# EAGLE board LilyPixel-Panel-v11 (EAGLE 6.6.0), part 1 of 2
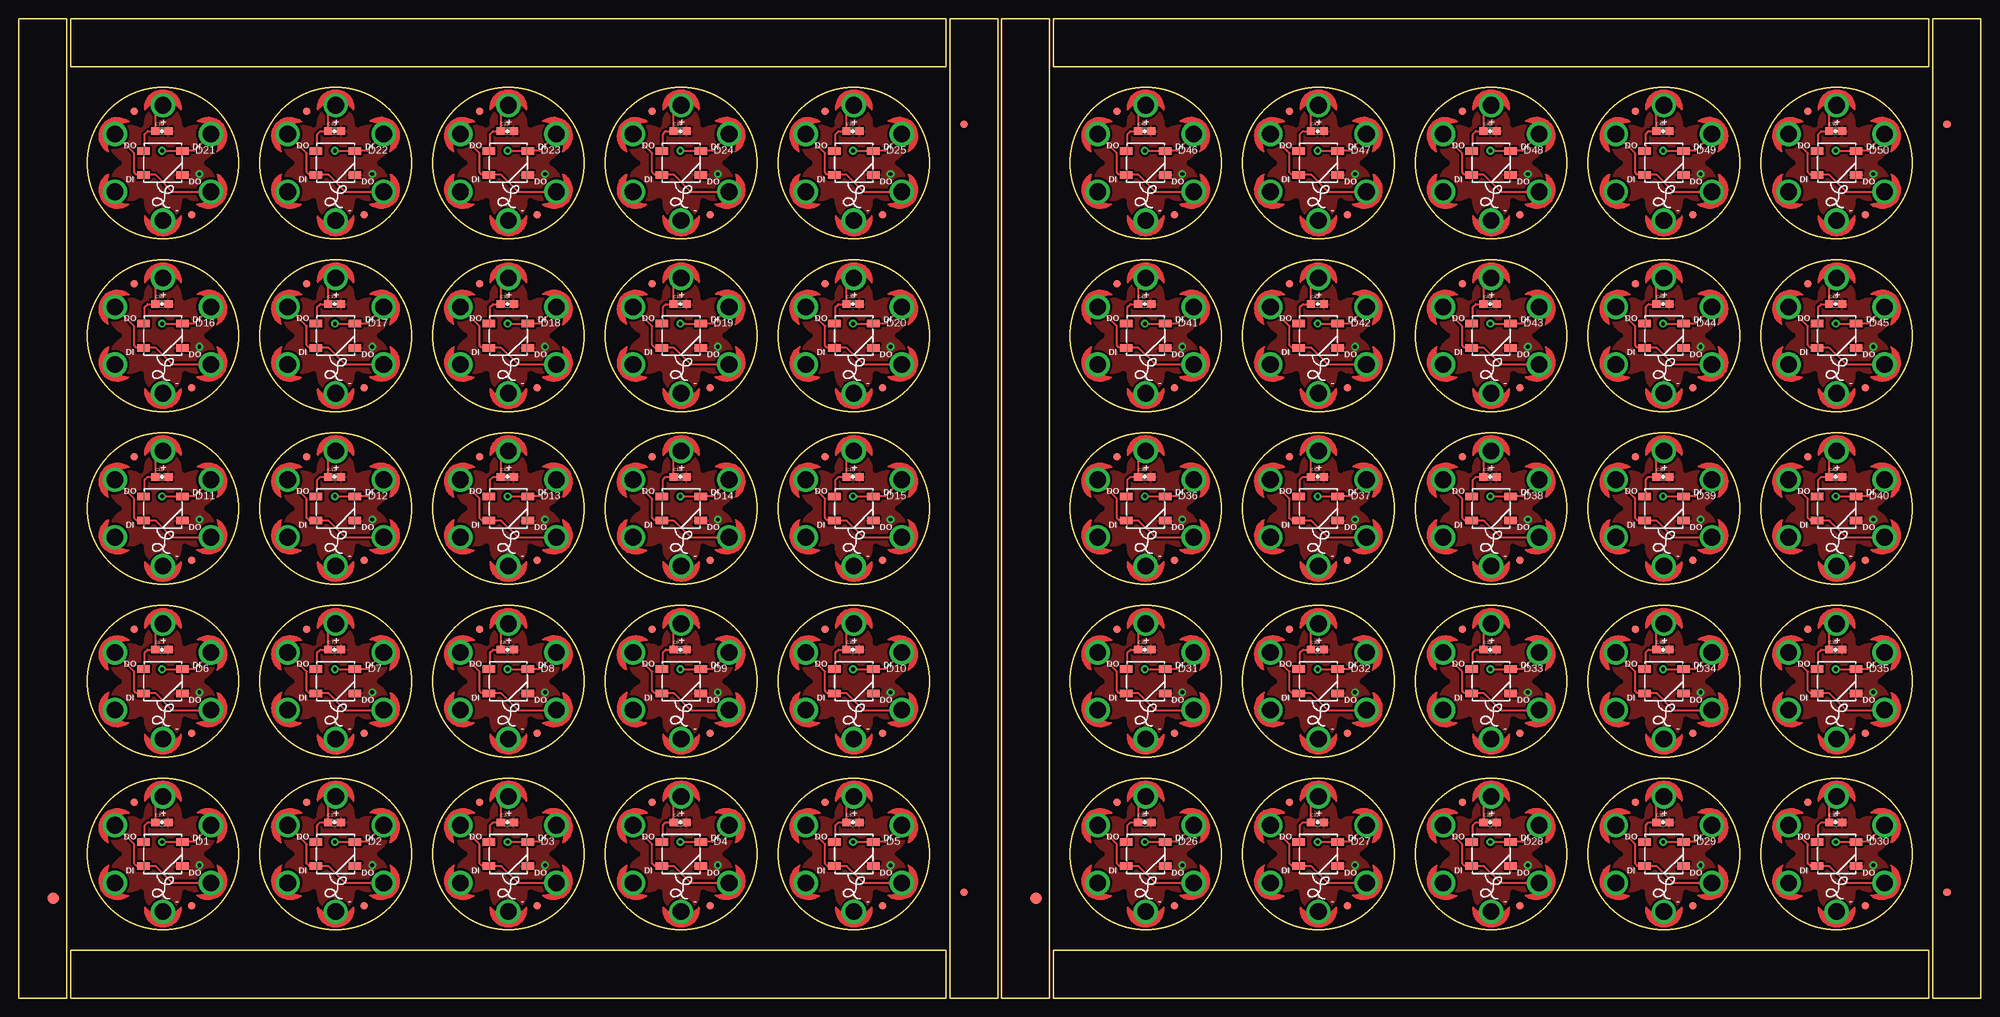
[diagram p0: board, top side]
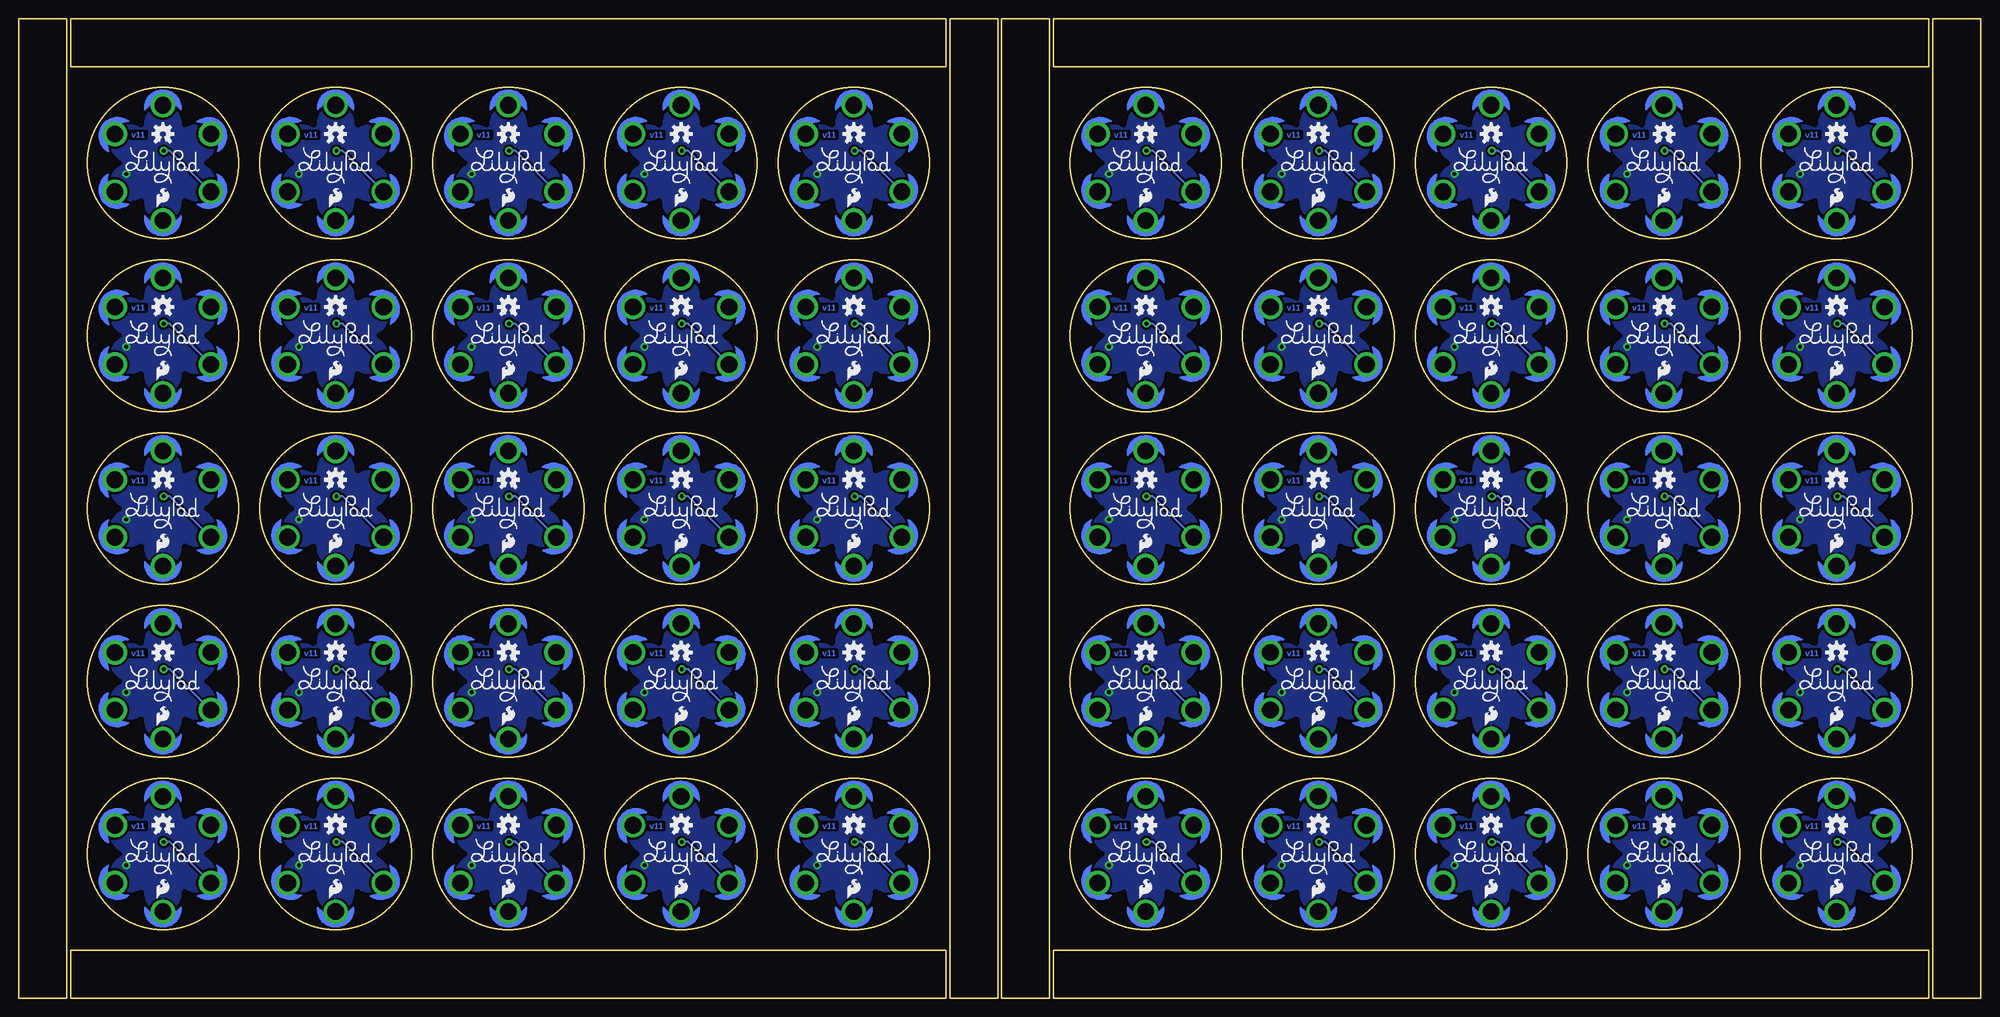
[diagram p1: board, bottom side, seen from below]

Size 259.59 x 129.54 mm. Coordinates in mm from the lower left corner, seen from the top.
Outline: 6.35,0 6.35,129.54 0,129.54 0,0 6.35,0
Outline: 6.86,0 122.68,0 122.68,6.35 6.86,6.35 6.86,0
Outline: 129.54,0 129.54,129.54 123.19,129.54 123.19,0 129.54,0
Outline: 122.68,129.54 6.86,129.54 6.86,123.19 122.68,123.19 122.68,129.54
Outline: 136.4,0 136.4,129.54 130.05,129.54 130.05,0 136.4,0
Outline: 136.91,0 252.73,0 252.73,6.35 136.91,6.35 136.91,0
Outline: 259.59,0 259.59,129.54 253.24,129.54 253.24,0 259.59,0
Outline: 252.73,129.54 136.91,129.54 136.91,123.19 252.73,123.19 252.73,129.54
Outline: circle at 19.05,19.05 radius 10
Outline: circle at 41.91,19.05 radius 10
Outline: circle at 64.77,19.05 radius 10
Outline: circle at 87.63,19.05 radius 10
Outline: circle at 110.49,19.05 radius 10
Outline: circle at 19.05,41.91 radius 10
Outline: circle at 41.91,41.91 radius 10
Outline: circle at 64.77,41.91 radius 10
Outline: circle at 87.63,41.91 radius 10
Outline: circle at 110.49,41.91 radius 10
Outline: circle at 19.05,64.77 radius 10
Outline: circle at 41.91,64.77 radius 10
Outline: circle at 64.77,64.77 radius 10
Outline: circle at 87.63,64.77 radius 10
Outline: circle at 110.49,64.77 radius 10
Outline: circle at 19.05,87.63 radius 10
Outline: circle at 41.91,87.63 radius 10
Outline: circle at 64.77,87.63 radius 10
Outline: circle at 87.63,87.63 radius 10
Outline: circle at 110.49,87.63 radius 10
Copper layers (1*16): Top 0.035mm / dielectric 1.5mm / Bottom 0.035mm
Design rules "SparkFun-2-layer": minimum track width 7mil, minimum drill 15mil, track to track 8mil, track to pad 8mil, pad to pad 8mil, via to via 8mil, smd to smd 8mil, copper to edge 8mil, drill to drill 8mil, minimum pad ring 12mil, minimum via ring 10mil, stop-mask expansion 4mil, vias tented up to drill 20mil, thermal gap 10mil
tRestrict: area 8.9,19.1 to 19.1,29; area 19.1,19.1 to 29.2,29; area 19.1,8.9 to 29.2,19.1; area 8.9,8.9 to 19.1,19.1; area 31.8,19.1 to 41.9,29; area 41.9,19.1 to 52,29; area 41.9,8.9 to 52,19.1; area 31.8,8.9 to 41.9,19.1; area 54.7,19.1 to 64.8,29; area 64.8,19.1 to 74.9,29; area 64.8,8.9 to 74.9,19.1; area 54.7,8.9 to 64.8,19.1; 188 more areas; 300 lines
bRestrict: area 8.9,19.1 to 19.1,29; area 19.1,19.1 to 29.2,29; area 19.1,8.9 to 29.2,19.1; area 8.9,8.9 to 19.1,19.1; area 31.8,19.1 to 41.9,29; area 41.9,19.1 to 52,29; area 41.9,8.9 to 52,19.1; area 31.8,8.9 to 41.9,19.1; area 54.7,19.1 to 64.8,29; area 64.8,19.1 to 74.9,29; area 64.8,8.9 to 74.9,19.1; area 54.7,8.9 to 64.8,19.1; 188 more areas; 300 lines

## Footprints (pad centres in the part's own frame; a part is rotated, then mirrored left to right if it is on the bottom)
0603-CAP = smd 1.1 x 1: 1 -0.85,0; 2 0.85,0
WS2812B = smd 1.651 x 1: 1 -2.577,1.6; 2 -2.577,-1.6; 3 2.577,-1.6; 4 2.577,1.6
FIDUCIAL-1.5X3 = smd 1.5 x 1.5: 1 0,0
FIDUCIAL-1X2 = smd 1 x 1: 1 0,0
PETAL-SMALL-2SIDE = drill 2.2: 1 0,0

## Placement (x,y rotation side)
C1  0.1uF  [0603-CAP]  41.78,23.24 0 top
C2  0.1uF  [0603-CAP]  18.92,23.24 0 top
C3  0.1uF  [0603-CAP]  64.64,23.24 0 top
C4  0.1uF  [0603-CAP]  87.5,23.24 0 top
C5  0.1uF  [0603-CAP]  110.36,23.24 0 top
C6  0.1uF  [0603-CAP]  18.92,46.1 0 top
C7  0.1uF  [0603-CAP]  41.78,46.1 0 top
C8  0.1uF  [0603-CAP]  64.64,46.1 0 top
C9  0.1uF  [0603-CAP]  87.5,46.1 0 top
C10  0.1uF  [0603-CAP]  110.36,46.1 0 top
C11  0.1uF  [0603-CAP]  18.92,68.96 0 top
C12  0.1uF  [0603-CAP]  41.78,68.96 0 top
C13  0.1uF  [0603-CAP]  64.64,68.96 0 top
C14  0.1uF  [0603-CAP]  87.5,68.96 0 top
C15  0.1uF  [0603-CAP]  110.36,68.96 0 top
C16  0.1uF  [0603-CAP]  18.92,91.82 0 top
C17  0.1uF  [0603-CAP]  41.78,91.82 0 top
C18  0.1uF  [0603-CAP]  64.64,91.82 0 top
C19  0.1uF  [0603-CAP]  87.5,91.82 0 top
C20  0.1uF  [0603-CAP]  110.36,91.82 0 top
C21  0.1uF  [0603-CAP]  18.92,114.68 0 top
C22  0.1uF  [0603-CAP]  41.78,114.68 0 top
C23  0.1uF  [0603-CAP]  64.64,114.68 0 top
C24  0.1uF  [0603-CAP]  87.5,114.68 0 top
C25  0.1uF  [0603-CAP]  110.36,114.68 0 top
C26  0.1uF  [0603-CAP]  148.97,23.24 0 top
C27  0.1uF  [0603-CAP]  171.83,23.24 0 top
C28  0.1uF  [0603-CAP]  194.69,23.24 0 top
C29  0.1uF  [0603-CAP]  217.55,23.24 0 top
C30  0.1uF  [0603-CAP]  240.41,23.24 0 top
C31  0.1uF  [0603-CAP]  148.97,46.1 0 top
C32  0.1uF  [0603-CAP]  171.83,46.1 0 top
C33  0.1uF  [0603-CAP]  194.69,46.1 0 top
C34  0.1uF  [0603-CAP]  217.55,46.1 0 top
C35  0.1uF  [0603-CAP]  240.41,46.1 0 top
C36  0.1uF  [0603-CAP]  148.97,68.96 0 top
C37  0.1uF  [0603-CAP]  171.83,68.96 0 top
C38  0.1uF  [0603-CAP]  194.69,68.96 0 top
C39  0.1uF  [0603-CAP]  217.55,68.96 0 top
C40  0.1uF  [0603-CAP]  240.41,68.96 0 top
C41  0.1uF  [0603-CAP]  148.97,91.82 0 top
C42  0.1uF  [0603-CAP]  171.83,91.82 0 top
C43  0.1uF  [0603-CAP]  194.69,91.82 0 top
C44  0.1uF  [0603-CAP]  217.55,91.82 0 top
C45  0.1uF  [0603-CAP]  240.41,91.82 0 top
C46  0.1uF  [0603-CAP]  148.97,114.68 0 top
C47  0.1uF  [0603-CAP]  171.83,114.68 0 top
C48  0.1uF  [0603-CAP]  194.69,114.68 0 top
C49  0.1uF  [0603-CAP]  217.55,114.68 0 top
C50  0.1uF  [0603-CAP]  240.41,114.68 0 top
D1  WS2812B  [WS2812B]  19.05,19.05 0 top
D2  WS2812B  [WS2812B]  41.91,19.05 0 top
D3  WS2812B  [WS2812B]  64.77,19.05 0 top
D4  WS2812B  [WS2812B]  87.63,19.05 0 top
D5  WS2812B  [WS2812B]  110.49,19.05 0 top
D6  WS2812B  [WS2812B]  19.05,41.91 0 top
D7  WS2812B  [WS2812B]  41.91,41.91 0 top
D8  WS2812B  [WS2812B]  64.77,41.91 0 top
D9  WS2812B  [WS2812B]  87.63,41.91 0 top
D10  WS2812B  [WS2812B]  110.49,41.91 0 top
D11  WS2812B  [WS2812B]  19.05,64.77 0 top
D12  WS2812B  [WS2812B]  41.91,64.77 0 top
D13  WS2812B  [WS2812B]  64.77,64.77 0 top
D14  WS2812B  [WS2812B]  87.63,64.77 0 top
D15  WS2812B  [WS2812B]  110.49,64.77 0 top
D16  WS2812B  [WS2812B]  19.05,87.63 0 top
D17  WS2812B  [WS2812B]  41.91,87.63 0 top
D18  WS2812B  [WS2812B]  64.77,87.63 0 top
D19  WS2812B  [WS2812B]  87.63,87.63 0 top
D20  WS2812B  [WS2812B]  110.49,87.63 0 top
D21  WS2812B  [WS2812B]  19.05,110.49 0 top
D22  WS2812B  [WS2812B]  41.91,110.49 0 top
D23  WS2812B  [WS2812B]  64.77,110.49 0 top
D24  WS2812B  [WS2812B]  87.63,110.49 0 top
D25  WS2812B  [WS2812B]  110.49,110.49 0 top
D26  WS2812B  [WS2812B]  149.1,19.05 0 top
D27  WS2812B  [WS2812B]  171.96,19.05 0 top
D28  WS2812B  [WS2812B]  194.82,19.05 0 top
D29  WS2812B  [WS2812B]  217.68,19.05 0 top
D30  WS2812B  [WS2812B]  240.54,19.05 0 top
D31  WS2812B  [WS2812B]  149.1,41.91 0 top
D32  WS2812B  [WS2812B]  171.96,41.91 0 top
D33  WS2812B  [WS2812B]  194.82,41.91 0 top
D34  WS2812B  [WS2812B]  217.68,41.91 0 top
D35  WS2812B  [WS2812B]  240.54,41.91 0 top
D36  WS2812B  [WS2812B]  149.1,64.77 0 top
D37  WS2812B  [WS2812B]  171.96,64.77 0 top
D38  WS2812B  [WS2812B]  194.82,64.77 0 top
D39  WS2812B  [WS2812B]  217.68,64.77 0 top
D40  WS2812B  [WS2812B]  240.54,64.77 0 top
D41  WS2812B  [WS2812B]  149.1,87.63 0 top
D42  WS2812B  [WS2812B]  171.96,87.63 0 top
D43  WS2812B  [WS2812B]  194.82,87.63 0 top
D44  WS2812B  [WS2812B]  217.68,87.63 0 top
D45  WS2812B  [WS2812B]  240.54,87.63 0 top
D46  WS2812B  [WS2812B]  149.1,110.49 0 top
D47  WS2812B  [WS2812B]  171.96,110.49 0 top
D48  WS2812B  [WS2812B]  194.82,110.49 0 top
D49  WS2812B  [WS2812B]  217.68,110.49 0 top
D50  WS2812B  [WS2812B]  240.54,110.49 0 top
E$1  [FIDUCIAL-1.5X3]  4.57,13.21 0 top
E$2  [FIDUCIAL-1X2]  255.14,13.97 0 top
E$3  [FIDUCIAL-1X2]  255.14,115.57 180 top
E$4  [FIDUCIAL-1X2]  125.09,13.97 0 top
E$5  [FIDUCIAL-1X2]  125.09,115.57 180 top
E$6  [FIDUCIAL-1.5X3]  134.62,13.21 0 top
FID1  FIDUCIAL1X2  [FIDUCIAL-1X2]  15.24,25.91 0 top
FID2  FIDUCIAL1X2  [FIDUCIAL-1X2]  22.86,12.19 0 top
FID3  FIDUCIAL1X2  [FIDUCIAL-1X2]  38.1,25.91 0 top
FID4  FIDUCIAL1X2  [FIDUCIAL-1X2]  45.72,12.19 0 top
FID5  FIDUCIAL1X2  [FIDUCIAL-1X2]  60.96,25.91 0 top
FID6  FIDUCIAL1X2  [FIDUCIAL-1X2]  68.58,12.19 0 top
FID7  FIDUCIAL1X2  [FIDUCIAL-1X2]  83.82,25.91 0 top
FID8  FIDUCIAL1X2  [FIDUCIAL-1X2]  91.44,12.19 0 top
FID9  FIDUCIAL1X2  [FIDUCIAL-1X2]  106.68,25.91 0 top
FID10  FIDUCIAL1X2  [FIDUCIAL-1X2]  114.3,12.19 0 top
FID11  FIDUCIAL1X2  [FIDUCIAL-1X2]  15.24,48.77 0 top
FID12  FIDUCIAL1X2  [FIDUCIAL-1X2]  22.86,35.05 0 top
FID13  FIDUCIAL1X2  [FIDUCIAL-1X2]  38.1,48.77 0 top
FID14  FIDUCIAL1X2  [FIDUCIAL-1X2]  45.72,35.05 0 top
FID15  FIDUCIAL1X2  [FIDUCIAL-1X2]  60.96,48.77 0 top
FID16  FIDUCIAL1X2  [FIDUCIAL-1X2]  68.58,35.05 0 top
FID17  FIDUCIAL1X2  [FIDUCIAL-1X2]  83.82,48.77 0 top
FID18  FIDUCIAL1X2  [FIDUCIAL-1X2]  91.44,35.05 0 top
FID19  FIDUCIAL1X2  [FIDUCIAL-1X2]  106.68,48.77 0 top
FID20  FIDUCIAL1X2  [FIDUCIAL-1X2]  114.3,35.05 0 top
FID21  FIDUCIAL1X2  [FIDUCIAL-1X2]  15.24,71.63 0 top
FID22  FIDUCIAL1X2  [FIDUCIAL-1X2]  22.86,57.91 0 top
FID23  FIDUCIAL1X2  [FIDUCIAL-1X2]  38.1,71.63 0 top
FID24  FIDUCIAL1X2  [FIDUCIAL-1X2]  45.72,57.91 0 top
FID25  FIDUCIAL1X2  [FIDUCIAL-1X2]  60.96,71.63 0 top
FID26  FIDUCIAL1X2  [FIDUCIAL-1X2]  68.58,57.91 0 top
FID27  FIDUCIAL1X2  [FIDUCIAL-1X2]  83.82,71.63 0 top
FID28  FIDUCIAL1X2  [FIDUCIAL-1X2]  91.44,57.91 0 top
FID29  FIDUCIAL1X2  [FIDUCIAL-1X2]  106.68,71.63 0 top
FID30  FIDUCIAL1X2  [FIDUCIAL-1X2]  114.3,57.91 0 top
FID31  FIDUCIAL1X2  [FIDUCIAL-1X2]  15.24,94.49 0 top
FID32  FIDUCIAL1X2  [FIDUCIAL-1X2]  22.86,80.77 0 top
FID33  FIDUCIAL1X2  [FIDUCIAL-1X2]  38.1,94.49 0 top
FID34  FIDUCIAL1X2  [FIDUCIAL-1X2]  45.72,80.77 0 top
FID35  FIDUCIAL1X2  [FIDUCIAL-1X2]  60.96,94.49 0 top
FID36  FIDUCIAL1X2  [FIDUCIAL-1X2]  68.58,80.77 0 top
FID37  FIDUCIAL1X2  [FIDUCIAL-1X2]  83.82,94.49 0 top
FID38  FIDUCIAL1X2  [FIDUCIAL-1X2]  91.44,80.77 0 top
FID39  FIDUCIAL1X2  [FIDUCIAL-1X2]  106.68,94.49 0 top
FID40  FIDUCIAL1X2  [FIDUCIAL-1X2]  114.3,80.77 0 top
FID41  FIDUCIAL1X2  [FIDUCIAL-1X2]  15.24,117.35 0 top
FID42  FIDUCIAL1X2  [FIDUCIAL-1X2]  22.86,103.63 0 top
FID43  FIDUCIAL1X2  [FIDUCIAL-1X2]  38.1,117.35 0 top
FID44  FIDUCIAL1X2  [FIDUCIAL-1X2]  45.72,103.63 0 top
FID45  FIDUCIAL1X2  [FIDUCIAL-1X2]  60.96,117.35 0 top
FID46  FIDUCIAL1X2  [FIDUCIAL-1X2]  68.58,103.63 0 top
FID47  FIDUCIAL1X2  [FIDUCIAL-1X2]  83.82,117.35 0 top
FID48  FIDUCIAL1X2  [FIDUCIAL-1X2]  91.44,103.63 0 top
FID49  FIDUCIAL1X2  [FIDUCIAL-1X2]  106.68,117.35 0 top
FID50  FIDUCIAL1X2  [FIDUCIAL-1X2]  114.3,103.63 0 top
FID51  FIDUCIAL1X2  [FIDUCIAL-1X2]  145.29,25.91 0 top
FID52  FIDUCIAL1X2  [FIDUCIAL-1X2]  152.91,12.19 0 top
FID53  FIDUCIAL1X2  [FIDUCIAL-1X2]  168.15,25.91 0 top
FID54  FIDUCIAL1X2  [FIDUCIAL-1X2]  175.77,12.19 0 top
FID55  FIDUCIAL1X2  [FIDUCIAL-1X2]  191.01,25.91 0 top
FID56  FIDUCIAL1X2  [FIDUCIAL-1X2]  198.63,12.19 0 top
FID57  FIDUCIAL1X2  [FIDUCIAL-1X2]  213.87,25.91 0 top
FID58  FIDUCIAL1X2  [FIDUCIAL-1X2]  221.49,12.19 0 top
FID59  FIDUCIAL1X2  [FIDUCIAL-1X2]  236.73,25.91 0 top
FID60  FIDUCIAL1X2  [FIDUCIAL-1X2]  244.35,12.19 0 top
FID61  FIDUCIAL1X2  [FIDUCIAL-1X2]  145.29,48.77 0 top
FID62  FIDUCIAL1X2  [FIDUCIAL-1X2]  152.91,35.05 0 top
FID63  FIDUCIAL1X2  [FIDUCIAL-1X2]  168.15,48.77 0 top
FID64  FIDUCIAL1X2  [FIDUCIAL-1X2]  175.77,35.05 0 top
FID65  FIDUCIAL1X2  [FIDUCIAL-1X2]  191.01,48.77 0 top
FID66  FIDUCIAL1X2  [FIDUCIAL-1X2]  198.63,35.05 0 top
FID67  FIDUCIAL1X2  [FIDUCIAL-1X2]  213.87,48.77 0 top
FID68  FIDUCIAL1X2  [FIDUCIAL-1X2]  221.49,35.05 0 top
FID69  FIDUCIAL1X2  [FIDUCIAL-1X2]  236.73,48.77 0 top
FID70  FIDUCIAL1X2  [FIDUCIAL-1X2]  244.35,35.05 0 top
FID71  FIDUCIAL1X2  [FIDUCIAL-1X2]  145.29,71.63 0 top
FID72  FIDUCIAL1X2  [FIDUCIAL-1X2]  152.91,57.91 0 top
FID73  FIDUCIAL1X2  [FIDUCIAL-1X2]  168.15,71.63 0 top
FID74  FIDUCIAL1X2  [FIDUCIAL-1X2]  175.77,57.91 0 top
FID75  FIDUCIAL1X2  [FIDUCIAL-1X2]  191.01,71.63 0 top
FID76  FIDUCIAL1X2  [FIDUCIAL-1X2]  198.63,57.91 0 top
FID77  FIDUCIAL1X2  [FIDUCIAL-1X2]  213.87,71.63 0 top
FID78  FIDUCIAL1X2  [FIDUCIAL-1X2]  221.49,57.91 0 top
FID79  FIDUCIAL1X2  [FIDUCIAL-1X2]  236.73,71.63 0 top
FID80  FIDUCIAL1X2  [FIDUCIAL-1X2]  244.35,57.91 0 top
FID81  FIDUCIAL1X2  [FIDUCIAL-1X2]  145.29,94.49 0 top
FID82  FIDUCIAL1X2  [FIDUCIAL-1X2]  152.91,80.77 0 top
FID83  FIDUCIAL1X2  [FIDUCIAL-1X2]  168.15,94.49 0 top
FID84  FIDUCIAL1X2  [FIDUCIAL-1X2]  175.77,80.77 0 top
FID85  FIDUCIAL1X2  [FIDUCIAL-1X2]  191.01,94.49 0 top
FID86  FIDUCIAL1X2  [FIDUCIAL-1X2]  198.63,80.77 0 top
FID87  FIDUCIAL1X2  [FIDUCIAL-1X2]  213.87,94.49 0 top
FID88  FIDUCIAL1X2  [FIDUCIAL-1X2]  221.49,80.77 0 top
FID89  FIDUCIAL1X2  [FIDUCIAL-1X2]  236.73,94.49 0 top
FID90  FIDUCIAL1X2  [FIDUCIAL-1X2]  244.35,80.77 0 top
FID91  FIDUCIAL1X2  [FIDUCIAL-1X2]  145.29,117.35 0 top
FID92  FIDUCIAL1X2  [FIDUCIAL-1X2]  152.91,103.63 0 top
FID93  FIDUCIAL1X2  [FIDUCIAL-1X2]  168.15,117.35 0 top
FID94  FIDUCIAL1X2  [FIDUCIAL-1X2]  175.77,103.63 0 top
FID95  FIDUCIAL1X2  [FIDUCIAL-1X2]  191.01,117.35 0 top
FID96  FIDUCIAL1X2  [FIDUCIAL-1X2]  198.63,103.63 0 top
FID97  FIDUCIAL1X2  [FIDUCIAL-1X2]  213.87,117.35 0 top
FID98  FIDUCIAL1X2  [FIDUCIAL-1X2]  221.49,103.63 0 top
FID99  FIDUCIAL1X2  [FIDUCIAL-1X2]  236.73,117.35 0 top
FID100  FIDUCIAL1X2  [FIDUCIAL-1X2]  244.35,103.63 0 top
JP1  SEWTAP6  [PETAL-SMALL-2SIDE]  12.7,22.86 235 top
JP2  SEWTAP6  [PETAL-SMALL-2SIDE]  25.4,15.24 56 top
JP3  SEWTAP6  [PETAL-SMALL-2SIDE]  19.05,11.43 0 top
JP4  SEWTAP6  [PETAL-SMALL-2SIDE]  19.05,26.67 180 top
JP5  SEWTAP6  [PETAL-SMALL-2SIDE]  25.4,22.86 123 top
JP6  SEWTAP6  [PETAL-SMALL-2SIDE]  12.7,15.24 303 top
JP7  SEWTAP6  [PETAL-SMALL-2SIDE]  41.91,26.67 180 top
JP8  SEWTAP6  [PETAL-SMALL-2SIDE]  48.26,22.86 123 top
JP9  SEWTAP6  [PETAL-SMALL-2SIDE]  41.91,11.43 0 top
JP10  SEWTAP6  [PETAL-SMALL-2SIDE]  48.26,15.24 56 top
JP11  SEWTAP6  [PETAL-SMALL-2SIDE]  35.56,22.86 235 top
JP12  SEWTAP6  [PETAL-SMALL-2SIDE]  35.56,15.24 303 top
JP13  SEWTAP6  [PETAL-SMALL-2SIDE]  64.77,26.67 180 top
JP14  SEWTAP6  [PETAL-SMALL-2SIDE]  71.12,22.86 123 top
JP15  SEWTAP6  [PETAL-SMALL-2SIDE]  64.77,11.43 0 top
JP16  SEWTAP6  [PETAL-SMALL-2SIDE]  71.12,15.24 56 top
JP17  SEWTAP6  [PETAL-SMALL-2SIDE]  58.42,22.86 235 top
JP18  SEWTAP6  [PETAL-SMALL-2SIDE]  58.42,15.24 303 top
JP19  SEWTAP6  [PETAL-SMALL-2SIDE]  87.63,26.67 180 top
JP20  SEWTAP6  [PETAL-SMALL-2SIDE]  93.98,22.86 123 top
JP21  SEWTAP6  [PETAL-SMALL-2SIDE]  87.63,11.43 0 top
JP22  SEWTAP6  [PETAL-SMALL-2SIDE]  93.98,15.24 56 top
JP23  SEWTAP6  [PETAL-SMALL-2SIDE]  81.28,22.86 235 top
JP24  SEWTAP6  [PETAL-SMALL-2SIDE]  81.28,15.24 303 top
JP25  SEWTAP6  [PETAL-SMALL-2SIDE]  110.49,26.67 180 top
JP26  SEWTAP6  [PETAL-SMALL-2SIDE]  116.84,22.86 123 top
JP27  SEWTAP6  [PETAL-SMALL-2SIDE]  110.49,11.43 0 top
JP28  SEWTAP6  [PETAL-SMALL-2SIDE]  116.84,15.24 56 top
JP29  SEWTAP6  [PETAL-SMALL-2SIDE]  104.14,22.86 235 top
JP30  SEWTAP6  [PETAL-SMALL-2SIDE]  104.14,15.24 303 top
JP31  SEWTAP6  [PETAL-SMALL-2SIDE]  19.05,49.53 180 top
JP32  SEWTAP6  [PETAL-SMALL-2SIDE]  25.4,45.72 123 top
JP33  SEWTAP6  [PETAL-SMALL-2SIDE]  19.05,34.29 0 top
JP34  SEWTAP6  [PETAL-SMALL-2SIDE]  25.4,38.1 56 top
JP35  SEWTAP6  [PETAL-SMALL-2SIDE]  12.7,45.72 235 top
JP36  SEWTAP6  [PETAL-SMALL-2SIDE]  12.7,38.1 303 top
JP37  SEWTAP6  [PETAL-SMALL-2SIDE]  41.91,49.53 180 top
JP38  SEWTAP6  [PETAL-SMALL-2SIDE]  48.26,45.72 123 top
JP39  SEWTAP6  [PETAL-SMALL-2SIDE]  41.91,34.29 0 top
JP40  SEWTAP6  [PETAL-SMALL-2SIDE]  48.26,38.1 56 top
JP41  SEWTAP6  [PETAL-SMALL-2SIDE]  35.56,45.72 235 top
JP42  SEWTAP6  [PETAL-SMALL-2SIDE]  35.56,38.1 303 top
JP43  SEWTAP6  [PETAL-SMALL-2SIDE]  64.77,49.53 180 top
JP44  SEWTAP6  [PETAL-SMALL-2SIDE]  71.12,45.72 123 top
JP45  SEWTAP6  [PETAL-SMALL-2SIDE]  64.77,34.29 0 top
JP46  SEWTAP6  [PETAL-SMALL-2SIDE]  71.12,38.1 56 top
JP47  SEWTAP6  [PETAL-SMALL-2SIDE]  58.42,45.72 235 top
JP48  SEWTAP6  [PETAL-SMALL-2SIDE]  58.42,38.1 303 top
JP49  SEWTAP6  [PETAL-SMALL-2SIDE]  87.63,49.53 180 top
JP50  SEWTAP6  [PETAL-SMALL-2SIDE]  93.98,45.72 123 top
JP51  SEWTAP6  [PETAL-SMALL-2SIDE]  87.63,34.29 0 top
JP52  SEWTAP6  [PETAL-SMALL-2SIDE]  93.98,38.1 56 top
JP53  SEWTAP6  [PETAL-SMALL-2SIDE]  81.28,45.72 235 top
JP54  SEWTAP6  [PETAL-SMALL-2SIDE]  81.28,38.1 303 top
JP55  SEWTAP6  [PETAL-SMALL-2SIDE]  110.49,49.53 180 top
JP56  SEWTAP6  [PETAL-SMALL-2SIDE]  116.84,45.72 123 top
JP57  SEWTAP6  [PETAL-SMALL-2SIDE]  110.49,34.29 0 top
JP58  SEWTAP6  [PETAL-SMALL-2SIDE]  116.84,38.1 56 top
JP59  SEWTAP6  [PETAL-SMALL-2SIDE]  104.14,45.72 235 top
JP60  SEWTAP6  [PETAL-SMALL-2SIDE]  104.14,38.1 303 top
JP61  SEWTAP6  [PETAL-SMALL-2SIDE]  19.05,72.39 180 top
JP62  SEWTAP6  [PETAL-SMALL-2SIDE]  25.4,68.58 123 top
JP63  SEWTAP6  [PETAL-SMALL-2SIDE]  19.05,57.15 0 top
JP64  SEWTAP6  [PETAL-SMALL-2SIDE]  25.4,60.96 56 top
JP65  SEWTAP6  [PETAL-SMALL-2SIDE]  12.7,68.58 235 top
JP66  SEWTAP6  [PETAL-SMALL-2SIDE]  12.7,60.96 303 top
JP67  SEWTAP6  [PETAL-SMALL-2SIDE]  41.91,72.39 180 top
JP68  SEWTAP6  [PETAL-SMALL-2SIDE]  48.26,68.58 123 top
JP69  SEWTAP6  [PETAL-SMALL-2SIDE]  41.91,57.15 0 top
JP70  SEWTAP6  [PETAL-SMALL-2SIDE]  48.26,60.96 56 top
JP71  SEWTAP6  [PETAL-SMALL-2SIDE]  35.56,68.58 235 top
JP72  SEWTAP6  [PETAL-SMALL-2SIDE]  35.56,60.96 303 top
JP73  SEWTAP6  [PETAL-SMALL-2SIDE]  64.77,72.39 180 top
JP74  SEWTAP6  [PETAL-SMALL-2SIDE]  71.12,68.58 123 top
JP75  SEWTAP6  [PETAL-SMALL-2SIDE]  64.77,57.15 0 top
JP76  SEWTAP6  [PETAL-SMALL-2SIDE]  71.12,60.96 56 top
JP77  SEWTAP6  [PETAL-SMALL-2SIDE]  58.42,68.58 235 top
JP78  SEWTAP6  [PETAL-SMALL-2SIDE]  58.42,60.96 303 top
JP79  SEWTAP6  [PETAL-SMALL-2SIDE]  87.63,72.39 180 top
JP80  SEWTAP6  [PETAL-SMALL-2SIDE]  93.98,68.58 123 top
JP81  SEWTAP6  [PETAL-SMALL-2SIDE]  87.63,57.15 0 top
JP82  SEWTAP6  [PETAL-SMALL-2SIDE]  93.98,60.96 56 top
JP83  SEWTAP6  [PETAL-SMALL-2SIDE]  81.28,68.58 235 top
JP84  SEWTAP6  [PETAL-SMALL-2SIDE]  81.28,60.96 303 top
JP85  SEWTAP6  [PETAL-SMALL-2SIDE]  110.49,72.39 180 top
JP86  SEWTAP6  [PETAL-SMALL-2SIDE]  116.84,68.58 123 top
JP87  SEWTAP6  [PETAL-SMALL-2SIDE]  110.49,57.15 0 top
JP88  SEWTAP6  [PETAL-SMALL-2SIDE]  116.84,60.96 56 top
JP89  SEWTAP6  [PETAL-SMALL-2SIDE]  104.14,68.58 235 top
JP90  SEWTAP6  [PETAL-SMALL-2SIDE]  104.14,60.96 303 top
JP91  SEWTAP6  [PETAL-SMALL-2SIDE]  19.05,95.25 180 top
JP92  SEWTAP6  [PETAL-SMALL-2SIDE]  25.4,91.44 123 top
JP93  SEWTAP6  [PETAL-SMALL-2SIDE]  19.05,80.01 0 top
JP94  SEWTAP6  [PETAL-SMALL-2SIDE]  25.4,83.82 56 top
JP95  SEWTAP6  [PETAL-SMALL-2SIDE]  12.7,91.44 235 top
JP96  SEWTAP6  [PETAL-SMALL-2SIDE]  12.7,83.82 303 top
JP97  SEWTAP6  [PETAL-SMALL-2SIDE]  41.91,95.25 180 top
JP98  SEWTAP6  [PETAL-SMALL-2SIDE]  48.26,91.44 123 top
JP99  SEWTAP6  [PETAL-SMALL-2SIDE]  41.91,80.01 0 top
JP100  SEWTAP6  [PETAL-SMALL-2SIDE]  48.26,83.82 56 top
JP101  SEWTAP6  [PETAL-SMALL-2SIDE]  35.56,91.44 235 top
JP102  SEWTAP6  [PETAL-SMALL-2SIDE]  35.56,83.82 303 top
JP103  SEWTAP6  [PETAL-SMALL-2SIDE]  64.77,95.25 180 top
JP104  SEWTAP6  [PETAL-SMALL-2SIDE]  71.12,91.44 123 top
JP105  SEWTAP6  [PETAL-SMALL-2SIDE]  64.77,80.01 0 top
JP106  SEWTAP6  [PETAL-SMALL-2SIDE]  71.12,83.82 56 top
JP107  SEWTAP6  [PETAL-SMALL-2SIDE]  58.42,91.44 235 top
JP108  SEWTAP6  [PETAL-SMALL-2SIDE]  58.42,83.82 303 top
JP109  SEWTAP6  [PETAL-SMALL-2SIDE]  87.63,95.25 180 top
JP110  SEWTAP6  [PETAL-SMALL-2SIDE]  93.98,91.44 123 top
JP111  SEWTAP6  [PETAL-SMALL-2SIDE]  87.63,80.01 0 top
JP112  SEWTAP6  [PETAL-SMALL-2SIDE]  93.98,83.82 56 top
JP113  SEWTAP6  [PETAL-SMALL-2SIDE]  81.28,91.44 235 top
JP114  SEWTAP6  [PETAL-SMALL-2SIDE]  81.28,83.82 303 top
JP115  SEWTAP6  [PETAL-SMALL-2SIDE]  110.49,95.25 180 top
JP116  SEWTAP6  [PETAL-SMALL-2SIDE]  116.84,91.44 123 top
JP117  SEWTAP6  [PETAL-SMALL-2SIDE]  110.49,80.01 0 top
JP118  SEWTAP6  [PETAL-SMALL-2SIDE]  116.84,83.82 56 top
JP119  SEWTAP6  [PETAL-SMALL-2SIDE]  104.14,91.44 235 top
JP120  SEWTAP6  [PETAL-SMALL-2SIDE]  104.14,83.82 303 top
JP121  SEWTAP6  [PETAL-SMALL-2SIDE]  19.05,118.11 180 top
JP122  SEWTAP6  [PETAL-SMALL-2SIDE]  25.4,114.3 123 top
JP123  SEWTAP6  [PETAL-SMALL-2SIDE]  19.05,102.87 0 top
JP124  SEWTAP6  [PETAL-SMALL-2SIDE]  25.4,106.68 56 top
JP125  SEWTAP6  [PETAL-SMALL-2SIDE]  12.7,114.3 235 top
JP126  SEWTAP6  [PETAL-SMALL-2SIDE]  12.7,106.68 303 top
JP127  SEWTAP6  [PETAL-SMALL-2SIDE]  41.91,118.11 180 top
JP128  SEWTAP6  [PETAL-SMALL-2SIDE]  48.26,114.3 123 top
JP129  SEWTAP6  [PETAL-SMALL-2SIDE]  41.91,102.87 0 top
JP130  SEWTAP6  [PETAL-SMALL-2SIDE]  48.26,106.68 56 top
JP131  SEWTAP6  [PETAL-SMALL-2SIDE]  35.56,114.3 235 top
JP132  SEWTAP6  [PETAL-SMALL-2SIDE]  35.56,106.68 303 top
JP133  SEWTAP6  [PETAL-SMALL-2SIDE]  64.77,118.11 180 top
JP134  SEWTAP6  [PETAL-SMALL-2SIDE]  71.12,114.3 123 top
JP135  SEWTAP6  [PETAL-SMALL-2SIDE]  64.77,102.87 0 top
JP136  SEWTAP6  [PETAL-SMALL-2SIDE]  71.12,106.68 56 top
JP137  SEWTAP6  [PETAL-SMALL-2SIDE]  58.42,114.3 235 top
JP138  SEWTAP6  [PETAL-SMALL-2SIDE]  58.42,106.68 303 top
JP139  SEWTAP6  [PETAL-SMALL-2SIDE]  87.63,118.11 180 top
JP140  SEWTAP6  [PETAL-SMALL-2SIDE]  93.98,114.3 123 top
JP141  SEWTAP6  [PETAL-SMALL-2SIDE]  87.63,102.87 0 top
JP142  SEWTAP6  [PETAL-SMALL-2SIDE]  93.98,106.68 56 top
JP143  SEWTAP6  [PETAL-SMALL-2SIDE]  81.28,114.3 235 top
JP144  SEWTAP6  [PETAL-SMALL-2SIDE]  81.28,106.68 303 top
JP145  SEWTAP6  [PETAL-SMALL-2SIDE]  110.49,118.11 180 top
JP146  SEWTAP6  [PETAL-SMALL-2SIDE]  116.84,114.3 123 top
JP147  SEWTAP6  [PETAL-SMALL-2SIDE]  110.49,102.87 0 top
JP148  SEWTAP6  [PETAL-SMALL-2SIDE]  116.84,106.68 56 top
JP149  SEWTAP6  [PETAL-SMALL-2SIDE]  104.14,114.3 235 top
JP150  SEWTAP6  [PETAL-SMALL-2SIDE]  104.14,106.68 303 top
JP151  SEWTAP6  [PETAL-SMALL-2SIDE]  149.1,26.67 180 top
JP152  SEWTAP6  [PETAL-SMALL-2SIDE]  155.45,22.86 123 top
JP153  SEWTAP6  [PETAL-SMALL-2SIDE]  149.1,11.43 0 top
JP154  SEWTAP6  [PETAL-SMALL-2SIDE]  155.45,15.24 56 top
JP155  SEWTAP6  [PETAL-SMALL-2SIDE]  142.75,22.86 235 top
JP156  SEWTAP6  [PETAL-SMALL-2SIDE]  142.75,15.24 303 top
JP157  SEWTAP6  [PETAL-SMALL-2SIDE]  171.96,26.67 180 top
JP158  SEWTAP6  [PETAL-SMALL-2SIDE]  178.31,22.86 123 top
JP159  SEWTAP6  [PETAL-SMALL-2SIDE]  171.96,11.43 0 top
JP160  SEWTAP6  [PETAL-SMALL-2SIDE]  178.31,15.24 56 top
JP161  SEWTAP6  [PETAL-SMALL-2SIDE]  165.61,22.86 235 top
JP162  SEWTAP6  [PETAL-SMALL-2SIDE]  165.61,15.24 303 top
JP163  SEWTAP6  [PETAL-SMALL-2SIDE]  194.82,26.67 180 top
JP164  SEWTAP6  [PETAL-SMALL-2SIDE]  201.17,22.86 123 top
JP165  SEWTAP6  [PETAL-SMALL-2SIDE]  194.82,11.43 0 top
JP166  SEWTAP6  [PETAL-SMALL-2SIDE]  201.17,15.24 56 top
JP167  SEWTAP6  [PETAL-SMALL-2SIDE]  188.47,22.86 235 top
JP168  SEWTAP6  [PETAL-SMALL-2SIDE]  188.47,15.24 303 top
JP169  SEWTAP6  [PETAL-SMALL-2SIDE]  217.68,26.67 180 top
JP170  SEWTAP6  [PETAL-SMALL-2SIDE]  224.03,22.86 123 top
JP171  SEWTAP6  [PETAL-SMALL-2SIDE]  217.68,11.43 0 top
JP172  SEWTAP6  [PETAL-SMALL-2SIDE]  224.03,15.24 56 top
JP173  SEWTAP6  [PETAL-SMALL-2SIDE]  211.33,22.86 235 top
JP174  SEWTAP6  [PETAL-SMALL-2SIDE]  211.33,15.24 303 top
JP175  SEWTAP6  [PETAL-SMALL-2SIDE]  240.54,26.67 180 top
JP176  SEWTAP6  [PETAL-SMALL-2SIDE]  246.89,22.86 123 top
JP177  SEWTAP6  [PETAL-SMALL-2SIDE]  240.54,11.43 0 top
JP178  SEWTAP6  [PETAL-SMALL-2SIDE]  246.89,15.24 56 top
JP179  SEWTAP6  [PETAL-SMALL-2SIDE]  234.19,22.86 235 top
JP180  SEWTAP6  [PETAL-SMALL-2SIDE]  234.19,15.24 303 top
JP181  SEWTAP6  [PETAL-SMALL-2SIDE]  149.1,49.53 180 top
JP182  SEWTAP6  [PETAL-SMALL-2SIDE]  155.45,45.72 123 top
JP183  SEWTAP6  [PETAL-SMALL-2SIDE]  149.1,34.29 0 top
JP184  SEWTAP6  [PETAL-SMALL-2SIDE]  155.45,38.1 56 top
JP185  SEWTAP6  [PETAL-SMALL-2SIDE]  142.75,45.72 235 top
JP186  SEWTAP6  [PETAL-SMALL-2SIDE]  142.75,38.1 303 top
JP187  SEWTAP6  [PETAL-SMALL-2SIDE]  171.96,49.53 180 top
JP188  SEWTAP6  [PETAL-SMALL-2SIDE]  178.31,45.72 123 top
JP189  SEWTAP6  [PETAL-SMALL-2SIDE]  171.96,34.29 0 top
JP190  SEWTAP6  [PETAL-SMALL-2SIDE]  178.31,38.1 56 top
JP191  SEWTAP6  [PETAL-SMALL-2SIDE]  165.61,45.72 235 top
JP192  SEWTAP6  [PETAL-SMALL-2SIDE]  165.61,38.1 303 top
JP193  SEWTAP6  [PETAL-SMALL-2SIDE]  194.82,49.53 180 top
JP194  SEWTAP6  [PETAL-SMALL-2SIDE]  201.17,45.72 123 top
JP195  SEWTAP6  [PETAL-SMALL-2SIDE]  194.82,34.29 0 top
JP196  SEWTAP6  [PETAL-SMALL-2SIDE]  201.17,38.1 56 top
JP197  SEWTAP6  [PETAL-SMALL-2SIDE]  188.47,45.72 235 top
JP198  SEWTAP6  [PETAL-SMALL-2SIDE]  188.47,38.1 303 top
JP199  SEWTAP6  [PETAL-SMALL-2SIDE]  217.68,49.53 180 top
JP200  SEWTAP6  [PETAL-SMALL-2SIDE]  224.03,45.72 123 top
JP201  SEWTAP6  [PETAL-SMALL-2SIDE]  217.68,34.29 0 top
JP202  SEWTAP6  [PETAL-SMALL-2SIDE]  224.03,38.1 56 top
JP203  SEWTAP6  [PETAL-SMALL-2SIDE]  211.33,45.72 235 top
JP204  SEWTAP6  [PETAL-SMALL-2SIDE]  211.33,38.1 303 top
JP205  SEWTAP6  [PETAL-SMALL-2SIDE]  240.54,49.53 180 top
JP206  SEWTAP6  [PETAL-SMALL-2SIDE]  246.89,45.72 123 top
JP207  SEWTAP6  [PETAL-SMALL-2SIDE]  240.54,34.29 0 top
JP208  SEWTAP6  [PETAL-SMALL-2SIDE]  246.89,38.1 56 top
JP209  SEWTAP6  [PETAL-SMALL-2SIDE]  234.19,45.72 235 top
JP210  SEWTAP6  [PETAL-SMALL-2SIDE]  234.19,38.1 303 top
JP211  SEWTAP6  [PETAL-SMALL-2SIDE]  149.1,72.39 180 top
JP212  SEWTAP6  [PETAL-SMALL-2SIDE]  155.45,68.58 123 top
JP213  SEWTAP6  [PETAL-SMALL-2SIDE]  149.1,57.15 0 top
JP214  SEWTAP6  [PETAL-SMALL-2SIDE]  155.45,60.96 56 top
JP215  SEWTAP6  [PETAL-SMALL-2SIDE]  142.75,68.58 235 top
JP216  SEWTAP6  [PETAL-SMALL-2SIDE]  142.75,60.96 303 top
JP217  SEWTAP6  [PETAL-SMALL-2SIDE]  171.96,72.39 180 top
JP218  SEWTAP6  [PETAL-SMALL-2SIDE]  178.31,68.58 123 top
JP219  SEWTAP6  [PETAL-SMALL-2SIDE]  171.96,57.15 0 top
JP220  SEWTAP6  [PETAL-SMALL-2SIDE]  178.31,60.96 56 top
JP221  SEWTAP6  [PETAL-SMALL-2SIDE]  165.61,68.58 235 top
JP222  SEWTAP6  [PETAL-SMALL-2SIDE]  165.61,60.96 303 top
JP223  SEWTAP6  [PETAL-SMALL-2SIDE]  194.82,72.39 180 top
JP224  SEWTAP6  [PETAL-SMALL-2SIDE]  201.17,68.58 123 top
JP225  SEWTAP6  [PETAL-SMALL-2SIDE]  194.82,57.15 0 top
JP226  SEWTAP6  [PETAL-SMALL-2SIDE]  201.17,60.96 56 top
JP227  SEWTAP6  [PETAL-SMALL-2SIDE]  188.47,68.58 235 top
JP228  SEWTAP6  [PETAL-SMALL-2SIDE]  188.47,60.96 303 top
JP229  SEWTAP6  [PETAL-SMALL-2SIDE]  217.68,72.39 180 top
JP230  SEWTAP6  [PETAL-SMALL-2SIDE]  224.03,68.58 123 top
JP231  SEWTAP6  [PETAL-SMALL-2SIDE]  217.68,57.15 0 top
JP232  SEWTAP6  [PETAL-SMALL-2SIDE]  224.03,60.96 56 top
JP233  SEWTAP6  [PETAL-SMALL-2SIDE]  211.33,68.58 235 top
JP234  SEWTAP6  [PETAL-SMALL-2SIDE]  211.33,60.96 303 top
JP235  SEWTAP6  [PETAL-SMALL-2SIDE]  240.54,72.39 180 top
JP236  SEWTAP6  [PETAL-SMALL-2SIDE]  246.89,68.58 123 top
JP237  SEWTAP6  [PETAL-SMALL-2SIDE]  240.54,57.15 0 top
JP238  SEWTAP6  [PETAL-SMALL-2SIDE]  246.89,60.96 56 top
JP239  SEWTAP6  [PETAL-SMALL-2SIDE]  234.19,68.58 235 top
JP240  SEWTAP6  [PETAL-SMALL-2SIDE]  234.19,60.96 303 top
JP241  SEWTAP6  [PETAL-SMALL-2SIDE]  149.1,95.25 180 top
JP242  SEWTAP6  [PETAL-SMALL-2SIDE]  155.45,91.44 123 top
JP243  SEWTAP6  [PETAL-SMALL-2SIDE]  149.1,80.01 0 top
JP244  SEWTAP6  [PETAL-SMALL-2SIDE]  155.45,83.82 56 top
JP245  SEWTAP6  [PETAL-SMALL-2SIDE]  142.75,91.44 235 top
JP246  SEWTAP6  [PETAL-SMALL-2SIDE]  142.75,83.82 303 top
JP247  SEWTAP6  [PETAL-SMALL-2SIDE]  171.96,95.25 180 top
JP248  SEWTAP6  [PETAL-SMALL-2SIDE]  178.31,91.44 123 top
JP249  SEWTAP6  [PETAL-SMALL-2SIDE]  171.96,80.01 0 top
JP250  SEWTAP6  [PETAL-SMALL-2SIDE]  178.31,83.82 56 top
JP251  SEWTAP6  [PETAL-SMALL-2SIDE]  165.61,91.44 235 top
JP252  SEWTAP6  [PETAL-SMALL-2SIDE]  165.61,83.82 303 top
JP253  SEWTAP6  [PETAL-SMALL-2SIDE]  194.82,95.25 180 top
JP254  SEWTAP6  [PETAL-SMALL-2SIDE]  201.17,91.44 123 top
JP255  SEWTAP6  [PETAL-SMALL-2SIDE]  194.82,80.01 0 top
JP256  SEWTAP6  [PETAL-SMALL-2SIDE]  201.17,83.82 56 top
JP257  SEWTAP6  [PETAL-SMALL-2SIDE]  188.47,91.44 235 top
JP258  SEWTAP6  [PETAL-SMALL-2SIDE]  188.47,83.82 303 top
JP259  SEWTAP6  [PETAL-SMALL-2SIDE]  217.68,95.25 180 top
JP260  SEWTAP6  [PETAL-SMALL-2SIDE]  224.03,91.44 123 top
JP261  SEWTAP6  [PETAL-SMALL-2SIDE]  217.68,80.01 0 top
JP262  SEWTAP6  [PETAL-SMALL-2SIDE]  224.03,83.82 56 top
JP263  SEWTAP6  [PETAL-SMALL-2SIDE]  211.33,91.44 235 top
JP264  SEWTAP6  [PETAL-SMALL-2SIDE]  211.33,83.82 303 top
JP265  SEWTAP6  [PETAL-SMALL-2SIDE]  240.54,95.25 180 top
JP266  SEWTAP6  [PETAL-SMALL-2SIDE]  246.89,91.44 123 top
JP267  SEWTAP6  [PETAL-SMALL-2SIDE]  240.54,80.01 0 top
JP268  SEWTAP6  [PETAL-SMALL-2SIDE]  246.89,83.82 56 top
JP269  SEWTAP6  [PETAL-SMALL-2SIDE]  234.19,91.44 235 top
JP270  SEWTAP6  [PETAL-SMALL-2SIDE]  234.19,83.82 303 top
JP271  SEWTAP6  [PETAL-SMALL-2SIDE]  149.1,118.11 180 top
JP272  SEWTAP6  [PETAL-SMALL-2SIDE]  155.45,114.3 123 top
JP273  SEWTAP6  [PETAL-SMALL-2SIDE]  149.1,102.87 0 top
JP274  SEWTAP6  [PETAL-SMALL-2SIDE]  155.45,106.68 56 top
JP275  SEWTAP6  [PETAL-SMALL-2SIDE]  142.75,114.3 235 top
JP276  SEWTAP6  [PETAL-SMALL-2SIDE]  142.75,106.68 303 top
JP277  SEWTAP6  [PETAL-SMALL-2SIDE]  171.96,118.11 180 top
JP278  SEWTAP6  [PETAL-SMALL-2SIDE]  178.31,114.3 123 top
JP279  SEWTAP6  [PETAL-SMALL-2SIDE]  171.96,102.87 0 top
JP280  SEWTAP6  [PETAL-SMALL-2SIDE]  178.31,106.68 56 top
JP281  SEWTAP6  [PETAL-SMALL-2SIDE]  165.61,114.3 235 top
JP282  SEWTAP6  [PETAL-SMALL-2SIDE]  165.61,106.68 303 top
JP283  SEWTAP6  [PETAL-SMALL-2SIDE]  194.82,118.11 180 top
JP284  SEWTAP6  [PETAL-SMALL-2SIDE]  201.17,114.3 123 top
JP285  SEWTAP6  [PETAL-SMALL-2SIDE]  194.82,102.87 0 top
JP286  SEWTAP6  [PETAL-SMALL-2SIDE]  201.17,106.68 56 top
JP287  SEWTAP6  [PETAL-SMALL-2SIDE]  188.47,114.3 235 top
JP288  SEWTAP6  [PETAL-SMALL-2SIDE]  188.47,106.68 303 top
JP289  SEWTAP6  [PETAL-SMALL-2SIDE]  217.68,118.11 180 top
JP290  SEWTAP6  [PETAL-SMALL-2SIDE]  224.03,114.3 123 top
JP291  SEWTAP6  [PETAL-SMALL-2SIDE]  217.68,102.87 0 top
JP292  SEWTAP6  [PETAL-SMALL-2SIDE]  224.03,106.68 56 top
JP293  SEWTAP6  [PETAL-SMALL-2SIDE]  211.33,114.3 235 top
JP294  SEWTAP6  [PETAL-SMALL-2SIDE]  211.33,106.68 303 top
JP295  SEWTAP6  [PETAL-SMALL-2SIDE]  240.54,118.11 180 top
JP296  SEWTAP6  [PETAL-SMALL-2SIDE]  246.89,114.3 123 top
JP297  SEWTAP6  [PETAL-SMALL-2SIDE]  240.54,102.87 0 top
JP298  SEWTAP6  [PETAL-SMALL-2SIDE]  246.89,106.68 56 top
JP299  SEWTAP6  [PETAL-SMALL-2SIDE]  234.19,114.3 235 top
JP300  SEWTAP6  [PETAL-SMALL-2SIDE]  234.19,106.68 303 top
LOGO1  OSHW-LOGOS  [OSHW-LOGO-S]  19.05,22.86 0 bottom
LOGO2  SFE_LOGO_FLAME.1_INCH  [SFE_LOGO_FLAME_.1]  20.19,12.83 0 bottom
LOGO3  OSHW-LOGOS  [OSHW-LOGO-S]  41.91,22.86 0 bottom
LOGO4  SFE_LOGO_FLAME.1_INCH  [SFE_LOGO_FLAME_.1]  43.05,12.83 0 bottom
LOGO5  OSHW-LOGOS  [OSHW-LOGO-S]  64.77,22.86 0 bottom
LOGO6  SFE_LOGO_FLAME.1_INCH  [SFE_LOGO_FLAME_.1]  65.91,12.83 0 bottom
LOGO7  OSHW-LOGOS  [OSHW-LOGO-S]  87.63,22.86 0 bottom
LOGO8  SFE_LOGO_FLAME.1_INCH  [SFE_LOGO_FLAME_.1]  88.77,12.83 0 bottom
LOGO9  OSHW-LOGOS  [OSHW-LOGO-S]  110.49,22.86 0 bottom
LOGO10  SFE_LOGO_FLAME.1_INCH  [SFE_LOGO_FLAME_.1]  111.63,12.83 0 bottom
LOGO11  OSHW-LOGOS  [OSHW-LOGO-S]  19.05,45.72 0 bottom
LOGO12  SFE_LOGO_FLAME.1_INCH  [SFE_LOGO_FLAME_.1]  20.19,35.69 0 bottom
LOGO13  OSHW-LOGOS  [OSHW-LOGO-S]  41.91,45.72 0 bottom
LOGO14  SFE_LOGO_FLAME.1_INCH  [SFE_LOGO_FLAME_.1]  43.05,35.69 0 bottom
LOGO15  OSHW-LOGOS  [OSHW-LOGO-S]  64.77,45.72 0 bottom
LOGO16  SFE_LOGO_FLAME.1_INCH  [SFE_LOGO_FLAME_.1]  65.91,35.69 0 bottom
LOGO17  OSHW-LOGOS  [OSHW-LOGO-S]  87.63,45.72 0 bottom
LOGO18  SFE_LOGO_FLAME.1_INCH  [SFE_LOGO_FLAME_.1]  88.77,35.69 0 bottom
LOGO19  OSHW-LOGOS  [OSHW-LOGO-S]  110.49,45.72 0 bottom
LOGO20  SFE_LOGO_FLAME.1_INCH  [SFE_LOGO_FLAME_.1]  111.63,35.69 0 bottom
LOGO21  OSHW-LOGOS  [OSHW-LOGO-S]  19.05,68.58 0 bottom
LOGO22  SFE_LOGO_FLAME.1_INCH  [SFE_LOGO_FLAME_.1]  20.19,58.55 0 bottom
LOGO23  OSHW-LOGOS  [OSHW-LOGO-S]  41.91,68.58 0 bottom
LOGO24  SFE_LOGO_FLAME.1_INCH  [SFE_LOGO_FLAME_.1]  43.05,58.55 0 bottom
LOGO25  OSHW-LOGOS  [OSHW-LOGO-S]  64.77,68.58 0 bottom
LOGO26  SFE_LOGO_FLAME.1_INCH  [SFE_LOGO_FLAME_.1]  65.91,58.55 0 bottom
LOGO27  OSHW-LOGOS  [OSHW-LOGO-S]  87.63,68.58 0 bottom
LOGO28  SFE_LOGO_FLAME.1_INCH  [SFE_LOGO_FLAME_.1]  88.77,58.55 0 bottom
LOGO29  OSHW-LOGOS  [OSHW-LOGO-S]  110.49,68.58 0 bottom
LOGO30  SFE_LOGO_FLAME.1_INCH  [SFE_LOGO_FLAME_.1]  111.63,58.55 0 bottom
LOGO31  OSHW-LOGOS  [OSHW-LOGO-S]  19.05,91.44 0 bottom
LOGO32  SFE_LOGO_FLAME.1_INCH  [SFE_LOGO_FLAME_.1]  20.19,81.41 0 bottom
LOGO33  OSHW-LOGOS  [OSHW-LOGO-S]  41.91,91.44 0 bottom
LOGO34  SFE_LOGO_FLAME.1_INCH  [SFE_LOGO_FLAME_.1]  43.05,81.41 0 bottom
LOGO35  OSHW-LOGOS  [OSHW-LOGO-S]  64.77,91.44 0 bottom
LOGO36  SFE_LOGO_FLAME.1_INCH  [SFE_LOGO_FLAME_.1]  65.91,81.41 0 bottom
LOGO37  OSHW-LOGOS  [OSHW-LOGO-S]  87.63,91.44 0 bottom
LOGO38  SFE_LOGO_FLAME.1_INCH  [SFE_LOGO_FLAME_.1]  88.77,81.41 0 bottom
LOGO39  OSHW-LOGOS  [OSHW-LOGO-S]  110.49,91.44 0 bottom
LOGO40  SFE_LOGO_FLAME.1_INCH  [SFE_LOGO_FLAME_.1]  111.63,81.41 0 bottom
LOGO41  OSHW-LOGOS  [OSHW-LOGO-S]  19.05,114.3 0 bottom
LOGO42  SFE_LOGO_FLAME.1_INCH  [SFE_LOGO_FLAME_.1]  20.19,104.27 0 bottom
LOGO43  OSHW-LOGOS  [OSHW-LOGO-S]  41.91,114.3 0 bottom
LOGO44  SFE_LOGO_FLAME.1_INCH  [SFE_LOGO_FLAME_.1]  43.05,104.27 0 bottom
LOGO45  OSHW-LOGOS  [OSHW-LOGO-S]  64.77,114.3 0 bottom
LOGO46  SFE_LOGO_FLAME.1_INCH  [SFE_LOGO_FLAME_.1]  65.91,104.27 0 bottom
LOGO47  OSHW-LOGOS  [OSHW-LOGO-S]  87.63,114.3 0 bottom
LOGO48  SFE_LOGO_FLAME.1_INCH  [SFE_LOGO_FLAME_.1]  88.77,104.27 0 bottom
LOGO49  OSHW-LOGOS  [OSHW-LOGO-S]  110.49,114.3 0 bottom
LOGO50  SFE_LOGO_FLAME.1_INCH  [SFE_LOGO_FLAME_.1]  111.63,104.27 0 bottom
LOGO51  OSHW-LOGOS  [OSHW-LOGO-S]  149.1,22.86 0 bottom
LOGO52  SFE_LOGO_FLAME.1_INCH  [SFE_LOGO_FLAME_.1]  150.24,12.83 0 bottom
LOGO53  OSHW-LOGOS  [OSHW-LOGO-S]  171.96,22.86 0 bottom
LOGO54  SFE_LOGO_FLAME.1_INCH  [SFE_LOGO_FLAME_.1]  173.1,12.83 0 bottom
LOGO55  OSHW-LOGOS  [OSHW-LOGO-S]  194.82,22.86 0 bottom
LOGO56  SFE_LOGO_FLAME.1_INCH  [SFE_LOGO_FLAME_.1]  195.96,12.83 0 bottom
LOGO57  OSHW-LOGOS  [OSHW-LOGO-S]  217.68,22.86 0 bottom
LOGO58  SFE_LOGO_FLAME.1_INCH  [SFE_LOGO_FLAME_.1]  218.82,12.83 0 bottom
LOGO59  OSHW-LOGOS  [OSHW-LOGO-S]  240.54,22.86 0 bottom
LOGO60  SFE_LOGO_FLAME.1_INCH  [SFE_LOGO_FLAME_.1]  241.68,12.83 0 bottom
LOGO61  OSHW-LOGOS  [OSHW-LOGO-S]  149.1,45.72 0 bottom
LOGO62  SFE_LOGO_FLAME.1_INCH  [SFE_LOGO_FLAME_.1]  150.24,35.69 0 bottom
LOGO63  OSHW-LOGOS  [OSHW-LOGO-S]  171.96,45.72 0 bottom
LOGO64  SFE_LOGO_FLAME.1_INCH  [SFE_LOGO_FLAME_.1]  173.1,35.69 0 bottom
LOGO65  OSHW-LOGOS  [OSHW-LOGO-S]  194.82,45.72 0 bottom
LOGO66  SFE_LOGO_FLAME.1_INCH  [SFE_LOGO_FLAME_.1]  195.96,35.69 0 bottom
LOGO67  OSHW-LOGOS  [OSHW-LOGO-S]  217.68,45.72 0 bottom
LOGO68  SFE_LOGO_FLAME.1_INCH  [SFE_LOGO_FLAME_.1]  218.82,35.69 0 bottom
LOGO69  OSHW-LOGOS  [OSHW-LOGO-S]  240.54,45.72 0 bottom
LOGO70  SFE_LOGO_FLAME.1_INCH  [SFE_LOGO_FLAME_.1]  241.68,35.69 0 bottom
LOGO71  OSHW-LOGOS  [OSHW-LOGO-S]  149.1,68.58 0 bottom
LOGO72  SFE_LOGO_FLAME.1_INCH  [SFE_LOGO_FLAME_.1]  150.24,58.55 0 bottom
LOGO73  OSHW-LOGOS  [OSHW-LOGO-S]  171.96,68.58 0 bottom
LOGO74  SFE_LOGO_FLAME.1_INCH  [SFE_LOGO_FLAME_.1]  173.1,58.55 0 bottom
LOGO75  OSHW-LOGOS  [OSHW-LOGO-S]  194.82,68.58 0 bottom
LOGO76  SFE_LOGO_FLAME.1_INCH  [SFE_LOGO_FLAME_.1]  195.96,58.55 0 bottom
LOGO77  OSHW-LOGOS  [OSHW-LOGO-S]  217.68,68.58 0 bottom
LOGO78  SFE_LOGO_FLAME.1_INCH  [SFE_LOGO_FLAME_.1]  218.82,58.55 0 bottom
LOGO79  OSHW-LOGOS  [OSHW-LOGO-S]  240.54,68.58 0 bottom
LOGO80  SFE_LOGO_FLAME.1_INCH  [SFE_LOGO_FLAME_.1]  241.68,58.55 0 bottom
LOGO81  OSHW-LOGOS  [OSHW-LOGO-S]  149.1,91.44 0 bottom
LOGO82  SFE_LOGO_FLAME.1_INCH  [SFE_LOGO_FLAME_.1]  150.24,81.41 0 bottom
LOGO83  OSHW-LOGOS  [OSHW-LOGO-S]  171.96,91.44 0 bottom
LOGO84  SFE_LOGO_FLAME.1_INCH  [SFE_LOGO_FLAME_.1]  173.1,81.41 0 bottom
LOGO85  OSHW-LOGOS  [OSHW-LOGO-S]  194.82,91.44 0 bottom
LOGO86  SFE_LOGO_FLAME.1_INCH  [SFE_LOGO_FLAME_.1]  195.96,81.41 0 bottom
LOGO87  OSHW-LOGOS  [OSHW-LOGO-S]  217.68,91.44 0 bottom
LOGO88  SFE_LOGO_FLAME.1_INCH  [SFE_LOGO_FLAME_.1]  218.82,81.41 0 bottom
LOGO89  OSHW-LOGOS  [OSHW-LOGO-S]  240.54,91.44 0 bottom
LOGO90  SFE_LOGO_FLAME.1_INCH  [SFE_LOGO_FLAME_.1]  241.68,81.41 0 bottom
LOGO91  OSHW-LOGOS  [OSHW-LOGO-S]  149.1,114.3 0 bottom
LOGO92  SFE_LOGO_FLAME.1_INCH  [SFE_LOGO_FLAME_.1]  150.24,104.27 0 bottom
LOGO93  OSHW-LOGOS  [OSHW-LOGO-S]  171.96,114.3 0 bottom
LOGO94  SFE_LOGO_FLAME.1_INCH  [SFE_LOGO_FLAME_.1]  173.1,104.27 0 bottom
LOGO95  OSHW-LOGOS  [OSHW-LOGO-S]  194.82,114.3 0 bottom
LOGO96  SFE_LOGO_FLAME.1_INCH  [SFE_LOGO_FLAME_.1]  195.96,104.27 0 bottom
LOGO97  OSHW-LOGOS  [OSHW-LOGO-S]  217.68,114.3 0 bottom
LOGO98  SFE_LOGO_FLAME.1_INCH  [SFE_LOGO_FLAME_.1]  218.82,104.27 0 bottom
LOGO99  OSHW-LOGOS  [OSHW-LOGO-S]  240.54,114.3 0 bottom
LOGO100  SFE_LOGO_FLAME.1_INCH  [SFE_LOGO_FLAME_.1]  241.68,104.27 0 bottom
U$1  LOGO-LPLP  [LOGO-LILYPAD]  19.05,19.05 0 bottom
U$2  LOGO-LPL  [LOGO-L]  41.91,14.73 0 top
U$3  LOGO-LPLP  [LOGO-LILYPAD]  41.91,19.05 0 bottom
U$4  LOGO-LPL  [LOGO-L]  64.77,14.73 0 top
U$5  LOGO-LPLP  [LOGO-LILYPAD]  64.77,19.05 0 bottom
U$6  LOGO-LPL  [LOGO-L]  87.63,14.73 0 top
U$7  LOGO-LPLP  [LOGO-LILYPAD]  87.63,19.05 0 bottom
U$8  LOGO-LPL  [LOGO-L]  19.05,14.73 0 top
U$9  LOGO-LPL  [LOGO-L]  110.49,14.73 0 top
U$10  LOGO-LPLP  [LOGO-LILYPAD]  110.49,19.05 0 bottom
U$11  LOGO-LPL  [LOGO-L]  19.05,37.59 0 top
U$12  LOGO-LPLP  [LOGO-LILYPAD]  19.05,41.91 0 bottom
U$13  LOGO-LPL  [LOGO-L]  41.91,37.59 0 top
U$14  LOGO-LPLP  [LOGO-LILYPAD]  41.91,41.91 0 bottom
U$15  LOGO-LPL  [LOGO-L]  64.77,37.59 0 top
U$16  LOGO-LPLP  [LOGO-LILYPAD]  64.77,41.91 0 bottom
U$17  LOGO-LPL  [LOGO-L]  87.63,37.59 0 top
U$18  LOGO-LPLP  [LOGO-LILYPAD]  87.63,41.91 0 bottom
U$19  LOGO-LPL  [LOGO-L]  110.49,37.59 0 top
U$20  LOGO-LPLP  [LOGO-LILYPAD]  110.49,41.91 0 bottom
U$21  LOGO-LPL  [LOGO-L]  19.05,60.45 0 top
U$22  LOGO-LPLP  [LOGO-LILYPAD]  19.05,64.77 0 bottom
U$23  LOGO-LPL  [LOGO-L]  41.91,60.45 0 top
U$24  LOGO-LPLP  [LOGO-LILYPAD]  41.91,64.77 0 bottom
U$25  LOGO-LPL  [LOGO-L]  64.77,60.45 0 top
U$26  LOGO-LPLP  [LOGO-LILYPAD]  64.77,64.77 0 bottom
U$27  LOGO-LPL  [LOGO-L]  87.63,60.45 0 top
U$28  LOGO-LPLP  [LOGO-LILYPAD]  87.63,64.77 0 bottom
U$29  LOGO-LPL  [LOGO-L]  110.49,60.45 0 top
U$30  LOGO-LPLP  [LOGO-LILYPAD]  110.49,64.77 0 bottom
U$31  LOGO-LPL  [LOGO-L]  19.05,83.31 0 top
U$32  LOGO-LPLP  [LOGO-LILYPAD]  19.05,87.63 0 bottom
U$33  LOGO-LPL  [LOGO-L]  41.91,83.31 0 top
U$34  LOGO-LPLP  [LOGO-LILYPAD]  41.91,87.63 0 bottom
U$35  LOGO-LPL  [LOGO-L]  64.77,83.31 0 top
U$36  LOGO-LPLP  [LOGO-LILYPAD]  64.77,87.63 0 bottom
U$37  LOGO-LPL  [LOGO-L]  87.63,83.31 0 top
U$38  LOGO-LPLP  [LOGO-LILYPAD]  87.63,87.63 0 bottom
U$39  LOGO-LPL  [LOGO-L]  110.49,83.31 0 top
U$40  LOGO-LPLP  [LOGO-LILYPAD]  110.49,87.63 0 bottom
U$41  LOGO-LPL  [LOGO-L]  19.05,106.17 0 top
U$42  LOGO-LPLP  [LOGO-LILYPAD]  19.05,110.49 0 bottom
U$43  LOGO-LPL  [LOGO-L]  41.91,106.17 0 top
U$44  LOGO-LPLP  [LOGO-LILYPAD]  41.91,110.49 0 bottom
U$45  LOGO-LPL  [LOGO-L]  64.77,106.17 0 top
U$46  LOGO-LPLP  [LOGO-LILYPAD]  64.77,110.49 0 bottom
U$47  LOGO-LPL  [LOGO-L]  87.63,106.17 0 top
U$48  LOGO-LPLP  [LOGO-LILYPAD]  87.63,110.49 0 bottom
U$49  LOGO-LPL  [LOGO-L]  110.49,106.17 0 top
U$50  LOGO-LPLP  [LOGO-LILYPAD]  110.49,110.49 0 bottom
U$51  LOGO-LPL  [LOGO-L]  149.1,14.73 0 top
U$52  LOGO-LPLP  [LOGO-LILYPAD]  149.1,19.05 0 bottom
U$53  LOGO-LPL  [LOGO-L]  171.96,14.73 0 top
U$54  LOGO-LPLP  [LOGO-LILYPAD]  171.96,19.05 0 bottom
U$55  LOGO-LPL  [LOGO-L]  194.82,14.73 0 top
U$56  LOGO-LPLP  [LOGO-LILYPAD]  194.82,19.05 0 bottom
U$57  LOGO-LPL  [LOGO-L]  217.68,14.73 0 top
U$58  LOGO-LPLP  [LOGO-LILYPAD]  217.68,19.05 0 bottom
U$59  LOGO-LPL  [LOGO-L]  240.54,14.73 0 top
U$60  LOGO-LPLP  [LOGO-LILYPAD]  240.54,19.05 0 bottom
U$61  LOGO-LPL  [LOGO-L]  149.1,37.59 0 top
U$62  LOGO-LPLP  [LOGO-LILYPAD]  149.1,41.91 0 bottom
U$63  LOGO-LPL  [LOGO-L]  171.96,37.59 0 top
U$64  LOGO-LPLP  [LOGO-LILYPAD]  171.96,41.91 0 bottom
U$65  LOGO-LPL  [LOGO-L]  194.82,37.59 0 top
U$66  LOGO-LPLP  [LOGO-LILYPAD]  194.82,41.91 0 bottom
U$67  LOGO-LPL  [LOGO-L]  217.68,37.59 0 top
U$68  LOGO-LPLP  [LOGO-LILYPAD]  217.68,41.91 0 bottom
U$69  LOGO-LPL  [LOGO-L]  240.54,37.59 0 top
U$70  LOGO-LPLP  [LOGO-LILYPAD]  240.54,41.91 0 bottom
U$71  LOGO-LPL  [LOGO-L]  149.1,60.45 0 top
U$72  LOGO-LPLP  [LOGO-LILYPAD]  149.1,64.77 0 bottom
U$73  LOGO-LPL  [LOGO-L]  171.96,60.45 0 top
U$74  LOGO-LPLP  [LOGO-LILYPAD]  171.96,64.77 0 bottom
U$75  LOGO-LPL  [LOGO-L]  194.82,60.45 0 top
U$76  LOGO-LPLP  [LOGO-LILYPAD]  194.82,64.77 0 bottom
U$77  LOGO-LPL  [LOGO-L]  217.68,60.45 0 top
U$78  LOGO-LPLP  [LOGO-LILYPAD]  217.68,64.77 0 bottom
U$79  LOGO-LPL  [LOGO-L]  240.54,60.45 0 top
U$80  LOGO-LPLP  [LOGO-LILYPAD]  240.54,64.77 0 bottom
U$81  LOGO-LPL  [LOGO-L]  149.1,83.31 0 top
U$82  LOGO-LPLP  [LOGO-LILYPAD]  149.1,87.63 0 bottom
U$83  LOGO-LPL  [LOGO-L]  171.96,83.31 0 top
U$84  LOGO-LPLP  [LOGO-LILYPAD]  171.96,87.63 0 bottom
U$85  LOGO-LPL  [LOGO-L]  194.82,83.31 0 top
U$86  LOGO-LPLP  [LOGO-LILYPAD]  194.82,87.63 0 bottom
U$87  LOGO-LPL  [LOGO-L]  217.68,83.31 0 top
U$88  LOGO-LPLP  [LOGO-LILYPAD]  217.68,87.63 0 bottom
U$89  LOGO-LPL  [LOGO-L]  240.54,83.31 0 top
U$90  LOGO-LPLP  [LOGO-LILYPAD]  240.54,87.63 0 bottom
U$91  LOGO-LPL  [LOGO-L]  149.1,106.17 0 top
U$92  LOGO-LPLP  [LOGO-LILYPAD]  149.1,110.49 0 bottom
U$93  LOGO-LPL  [LOGO-L]  171.96,106.17 0 top
U$94  LOGO-LPLP  [LOGO-LILYPAD]  171.96,110.49 0 bottom
U$95  LOGO-LPL  [LOGO-L]  194.82,106.17 0 top
U$96  LOGO-LPLP  [LOGO-LILYPAD]  194.82,110.49 0 bottom
U$97  LOGO-LPL  [LOGO-L]  217.68,106.17 0 top
U$98  LOGO-LPLP  [LOGO-LILYPAD]  217.68,110.49 0 bottom
U$99  LOGO-LPL  [LOGO-L]  240.54,106.17 0 top
U$100  LOGO-LPLP  [LOGO-LILYPAD]  240.54,110.49 0 bottom

## Library data of the parts
C1-C50 = SparkFun-Capacitors; PROD_ID: CAP-00810
D1-D50 = SparkFun-LED
E$1 E$6 = SparkFun-Retired
E$2-E$5 FID1-FID100 LOGO1-LOGO100 = SparkFun-Aesthetics
JP1-JP300 U$1-U$100 = LilyPad-Wearables

## Nets
DI1: D1.4 JP5.1 JP6.1
DI2: D2.4 JP8.1 JP12.1
DI3: D3.4 JP14.1 JP18.1
DI4: D4.4 JP20.1 JP24.1
DI5: D5.4 JP26.1 JP30.1
DI6: D6.4 JP32.1 JP36.1
DI7: D7.4 JP38.1 JP42.1
DI8: D8.4 JP44.1 JP48.1
DI9: D9.4 JP50.1 JP54.1
DI10: D10.4 JP56.1 JP60.1
DI11: D11.4 JP62.1 JP66.1
DI12: D12.4 JP68.1 JP72.1
DI13: D13.4 JP74.1 JP78.1
DI14: D14.4 JP80.1 JP84.1
DI15: D15.4 JP86.1 JP90.1
DI16: D16.4 JP92.1 JP96.1
DI17: D17.4 JP98.1 JP102.1
DI18: D18.4 JP104.1 JP108.1
DI19: D19.4 JP110.1 JP114.1
DI20: D20.4 JP116.1 JP120.1
DI21: D21.4 JP122.1 JP126.1
DI22: D22.4 JP128.1 JP132.1
DI23: D23.4 JP134.1 JP138.1
DI24: D24.4 JP140.1 JP144.1
DI25: D25.4 JP146.1 JP150.1
DI26: D26.4 JP152.1 JP156.1
DI27: D27.4 JP158.1 JP162.1
DI28: D28.4 JP164.1 JP168.1
DI29: D29.4 JP170.1 JP174.1
DI30: D30.4 JP176.1 JP180.1
DI31: D31.4 JP182.1 JP186.1
DI32: D32.4 JP188.1 JP192.1
DI33: D33.4 JP194.1 JP198.1
DI34: D34.4 JP200.1 JP204.1
DI35: D35.4 JP206.1 JP210.1
DI36: D36.4 JP212.1 JP216.1
DI37: D37.4 JP218.1 JP222.1
DI38: D38.4 JP224.1 JP228.1
DI39: D39.4 JP230.1 JP234.1
DI40: D40.4 JP236.1 JP240.1
DI41: D41.4 JP242.1 JP246.1
DI42: D42.4 JP248.1 JP252.1
DI43: D43.4 JP254.1 JP258.1
DI44: D44.4 JP260.1 JP264.1
DI45: D45.4 JP266.1 JP270.1
DI46: D46.4 JP272.1 JP276.1
DI47: D47.4 JP278.1 JP282.1
DI48: D48.4 JP284.1 JP288.1
DI49: D49.4 JP290.1 JP294.1
DI50: D50.4 JP296.1 JP300.1
DO1: D1.2 JP1.1 JP2.1
DO2: D2.2 JP10.1 JP11.1
DO3: D3.2 JP16.1 JP17.1
DO4: D4.2 JP22.1 JP23.1
DO5: D5.2 JP28.1 JP29.1
DO6: D6.2 JP34.1 JP35.1
DO7: D7.2 JP40.1 JP41.1
DO8: D8.2 JP46.1 JP47.1
DO9: D9.2 JP52.1 JP53.1
DO10: D10.2 JP58.1 JP59.1
DO11: D11.2 JP64.1 JP65.1
DO12: D12.2 JP70.1 JP71.1
DO13: D13.2 JP76.1 JP77.1
DO14: D14.2 JP82.1 JP83.1
DO15: D15.2 JP88.1 JP89.1
DO16: D16.2 JP94.1 JP95.1
DO17: D17.2 JP100.1 JP101.1
DO18: D18.2 JP106.1 JP107.1
DO19: D19.2 JP112.1 JP113.1
DO20: D20.2 JP118.1 JP119.1
DO21: D21.2 JP124.1 JP125.1
DO22: D22.2 JP130.1 JP131.1
DO23: D23.2 JP136.1 JP137.1
DO24: D24.2 JP142.1 JP143.1
DO25: D25.2 JP148.1 JP149.1
DO26: D26.2 JP154.1 JP155.1
DO27: D27.2 JP160.1 JP161.1
DO28: D28.2 JP166.1 JP167.1
DO29: D29.2 JP172.1 JP173.1
DO30: D30.2 JP178.1 JP179.1
DO31: D31.2 JP184.1 JP185.1
DO32: D32.2 JP190.1 JP191.1
DO33: D33.2 JP196.1 JP197.1
DO34: D34.2 JP202.1 JP203.1
DO35: D35.2 JP208.1 JP209.1
DO36: D36.2 JP214.1 JP215.1
DO37: D37.2 JP220.1 JP221.1
DO38: D38.2 JP226.1 JP227.1
DO39: D39.2 JP232.1 JP233.1
DO40: D40.2 JP238.1 JP239.1
DO41: D41.2 JP244.1 JP245.1
DO42: D42.2 JP250.1 JP251.1
DO43: D43.2 JP256.1 JP257.1
DO44: D44.2 JP262.1 JP263.1
DO45: D45.2 JP268.1 JP269.1
DO46: D46.2 JP274.1 JP275.1
DO47: D47.2 JP280.1 JP281.1
DO48: D48.2 JP286.1 JP287.1
DO49: D49.2 JP292.1 JP293.1
DO50: D50.2 JP298.1 JP299.1
GND: C2.2 D1.3 JP3.1
GND1: C1.2 D2.3 JP9.1
GND2: C3.2 D3.3 JP15.1
GND3: C4.2 D4.3 JP21.1
GND4: C5.2 D5.3 JP27.1
GND5: C6.2 D6.3 JP33.1
GND6: C7.2 D7.3 JP39.1
GND7: C8.2 D8.3 JP45.1
GND8: C9.2 D9.3 JP51.1
GND9: C10.2 D10.3 JP57.1
GND10: C11.2 D11.3 JP63.1
GND11: C12.2 D12.3 JP69.1
GND12: C13.2 D13.3 JP75.1
GND13: C14.2 D14.3 JP81.1
GND14: C15.2 D15.3 JP87.1
GND15: C16.2 D16.3 JP93.1
GND16: C17.2 D17.3 JP99.1
GND17: C18.2 D18.3 JP105.1
GND18: C19.2 D19.3 JP111.1
GND19: C20.2 D20.3 JP117.1
GND20: C21.2 D21.3 JP123.1
GND21: C22.2 D22.3 JP129.1
GND22: C23.2 D23.3 JP135.1
GND23: C24.2 D24.3 JP141.1
GND24: C25.2 D25.3 JP147.1
GND25: C26.2 D26.3 JP153.1
GND26: C27.2 D27.3 JP159.1
GND27: C28.2 D28.3 JP165.1
GND28: C29.2 D29.3 JP171.1
GND29: C30.2 D30.3 JP177.1
GND30: C31.2 D31.3 JP183.1
GND31: C32.2 D32.3 JP189.1
GND32: C33.2 D33.3 JP195.1
GND33: C34.2 D34.3 JP201.1
GND34: C35.2 D35.3 JP207.1
GND35: C36.2 D36.3 JP213.1
GND36: C37.2 D37.3 JP219.1
GND37: C38.2 D38.3 JP225.1
GND38: C39.2 D39.3 JP231.1
GND39: C40.2 D40.3 JP237.1
GND40: C41.2 D41.3 JP243.1
GND41: C42.2 D42.3 JP249.1
GND42: C43.2 D43.3 JP255.1
GND43: C44.2 D44.3 JP261.1
GND44: C45.2 D45.3 JP267.1
GND45: C46.2 D46.3 JP273.1
GND46: C47.2 D47.3 JP279.1
GND47: C48.2 D48.3 JP285.1
GND48: C49.2 D49.3 JP291.1
GND49: C50.2 D50.3 JP297.1
VCC: C2.1 D1.1 JP4.1
VCC1: C1.1 D2.1 JP7.1
VCC2: C3.1 D3.1 JP13.1
VCC3: C4.1 D4.1 JP19.1
VCC4: C5.1 D5.1 JP25.1
VCC5: C6.1 D6.1 JP31.1
VCC6: C7.1 D7.1 JP37.1
VCC7: C8.1 D8.1 JP43.1
VCC8: C9.1 D9.1 JP49.1
VCC9: C10.1 D10.1 JP55.1
VCC10: C11.1 D11.1 JP61.1
VCC11: C12.1 D12.1 JP67.1
VCC12: C13.1 D13.1 JP73.1
VCC13: C14.1 D14.1 JP79.1
VCC14: C15.1 D15.1 JP85.1
VCC15: C16.1 D16.1 JP91.1
VCC16: C17.1 D17.1 JP97.1
VCC17: C18.1 D18.1 JP103.1
VCC18: C19.1 D19.1 JP109.1
VCC19: C20.1 D20.1 JP115.1
VCC20: C21.1 D21.1 JP121.1
VCC21: C22.1 D22.1 JP127.1
VCC22: C23.1 D23.1 JP133.1
VCC23: C24.1 D24.1 JP139.1
VCC24: C25.1 D25.1 JP145.1
VCC25: C26.1 D26.1 JP151.1
VCC26: C27.1 D27.1 JP157.1
VCC27: C28.1 D28.1 JP163.1
VCC28: C29.1 D29.1 JP169.1
VCC29: C30.1 D30.1 JP175.1
VCC30: C31.1 D31.1 JP181.1
VCC31: C32.1 D32.1 JP187.1
VCC32: C33.1 D33.1 JP193.1
VCC33: C34.1 D34.1 JP199.1
VCC34: C35.1 D35.1 JP205.1
VCC35: C36.1 D36.1 JP211.1
VCC36: C37.1 D37.1 JP217.1
VCC37: C38.1 D38.1 JP223.1
VCC38: C39.1 D39.1 JP229.1
VCC39: C40.1 D40.1 JP235.1
VCC40: C41.1 D41.1 JP241.1
VCC41: C42.1 D42.1 JP247.1
VCC42: C43.1 D43.1 JP253.1
VCC43: C44.1 D44.1 JP259.1
VCC44: C45.1 D45.1 JP265.1
VCC45: C46.1 D46.1 JP271.1
VCC46: C47.1 D47.1 JP277.1
VCC47: C48.1 D48.1 JP283.1
VCC48: C49.1 D49.1 JP289.1
VCC49: C50.1 D50.1 JP295.1